# Altium PCB OSV-UserInterface.PcbDoc
Units mm, origin at the board's own origin, x right, y up, seen from the top; angles counter-clockwise.
Board outline 84 x 100 mm, 2 copper layers (Top Layer, Bottom Layer), stack 1.571 mm thick; 37 components, 32 nets, 144 pads, 13 vias.
Unrouted connection lines stored in the file: 12.
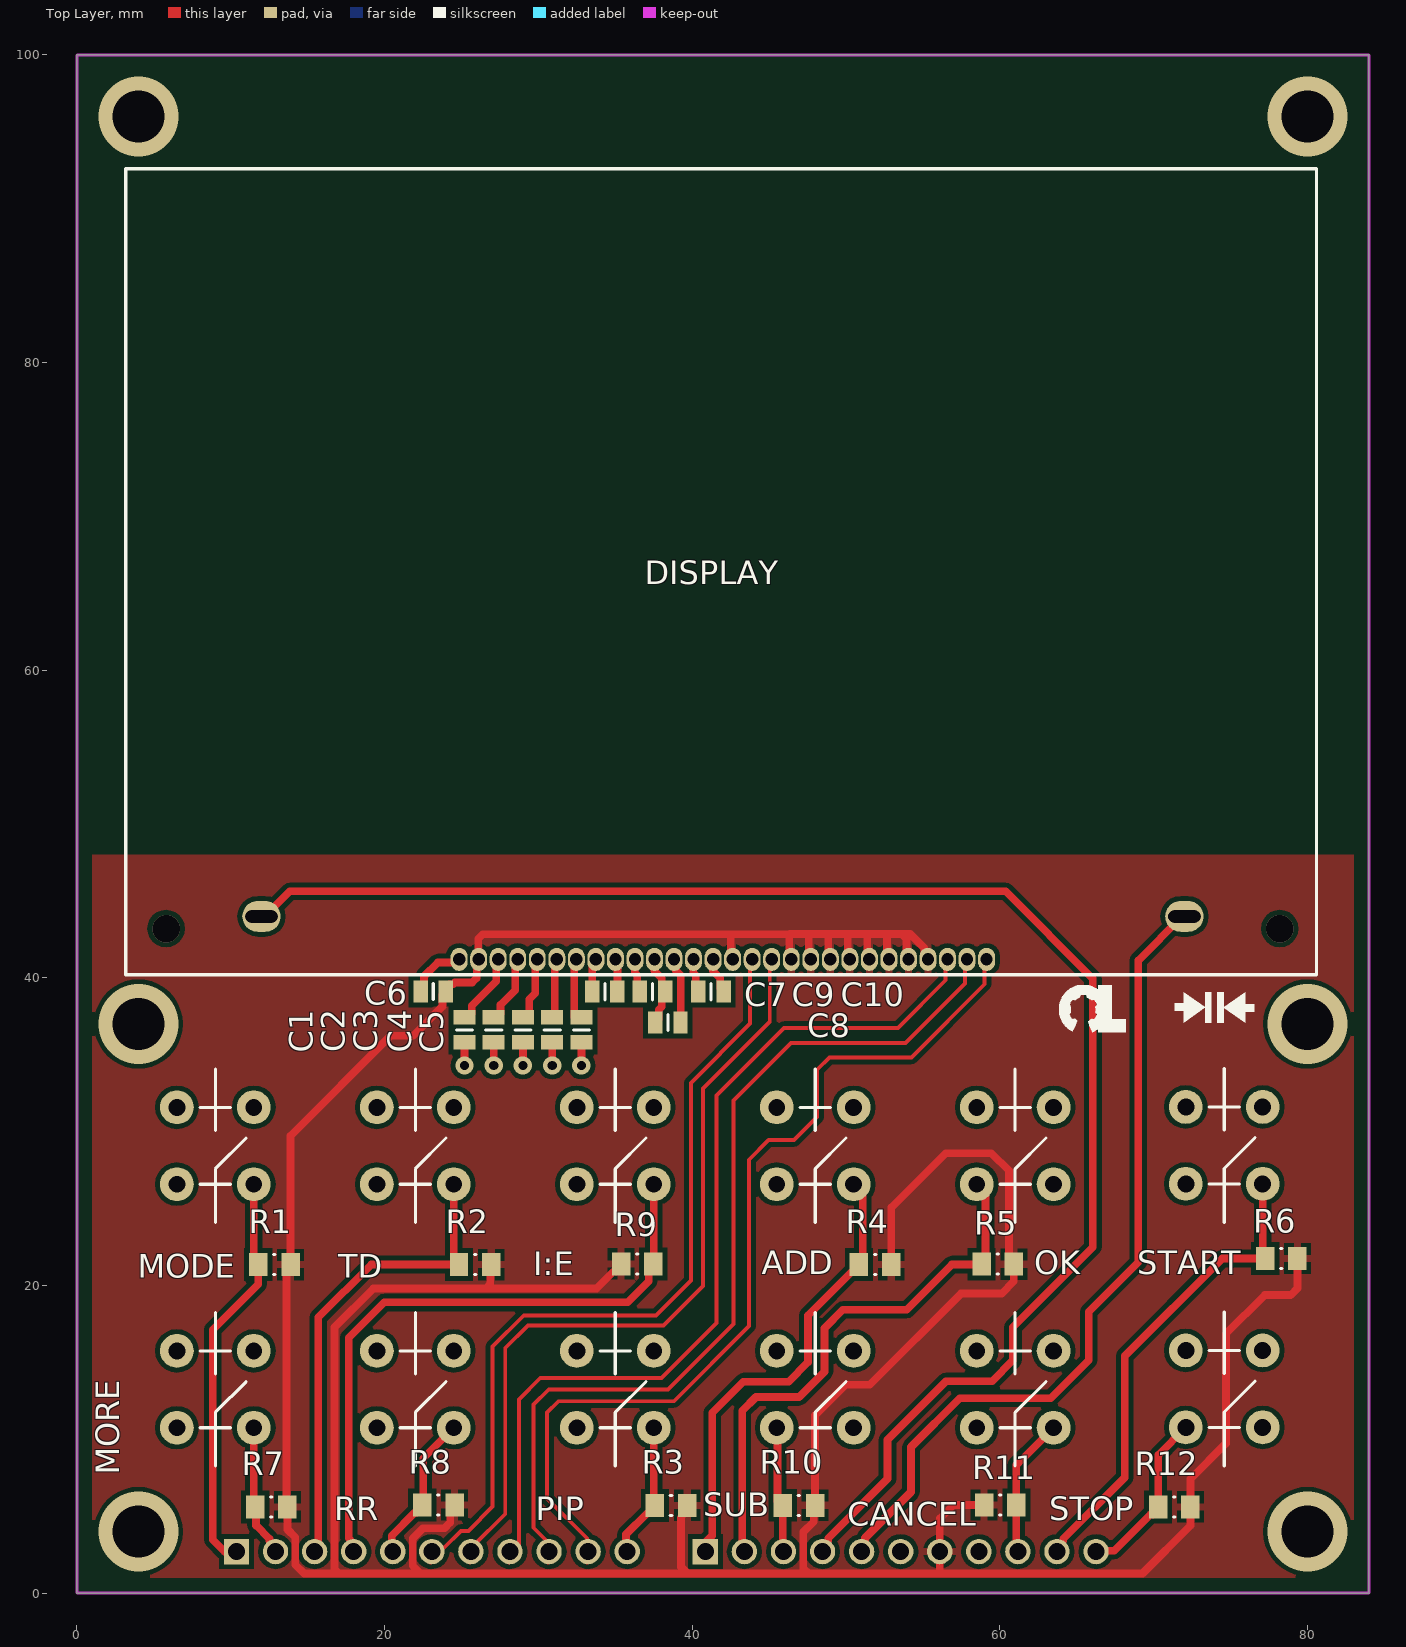
[diagram p0: Top Layer view]
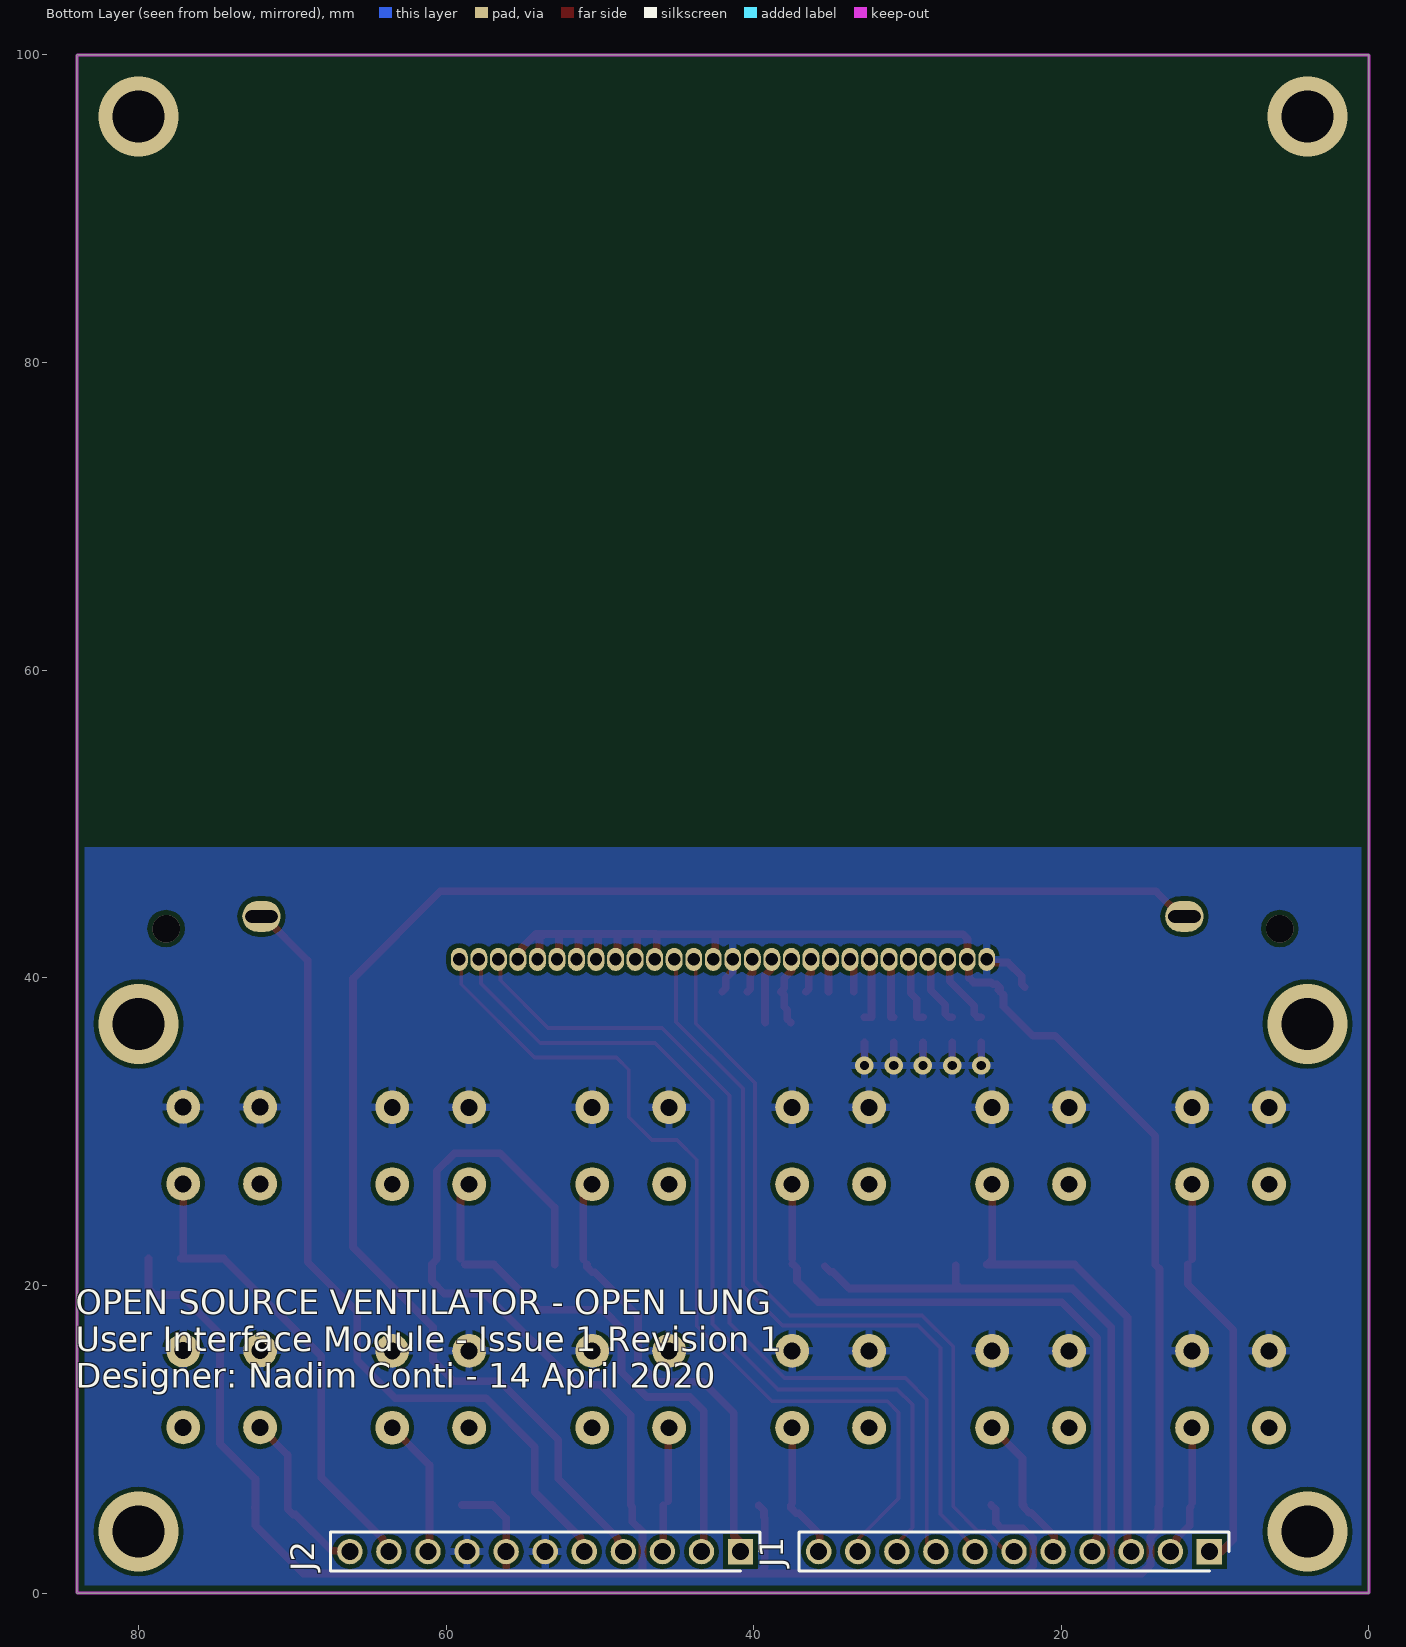
[diagram p1: Bottom Layer view, seen from below]
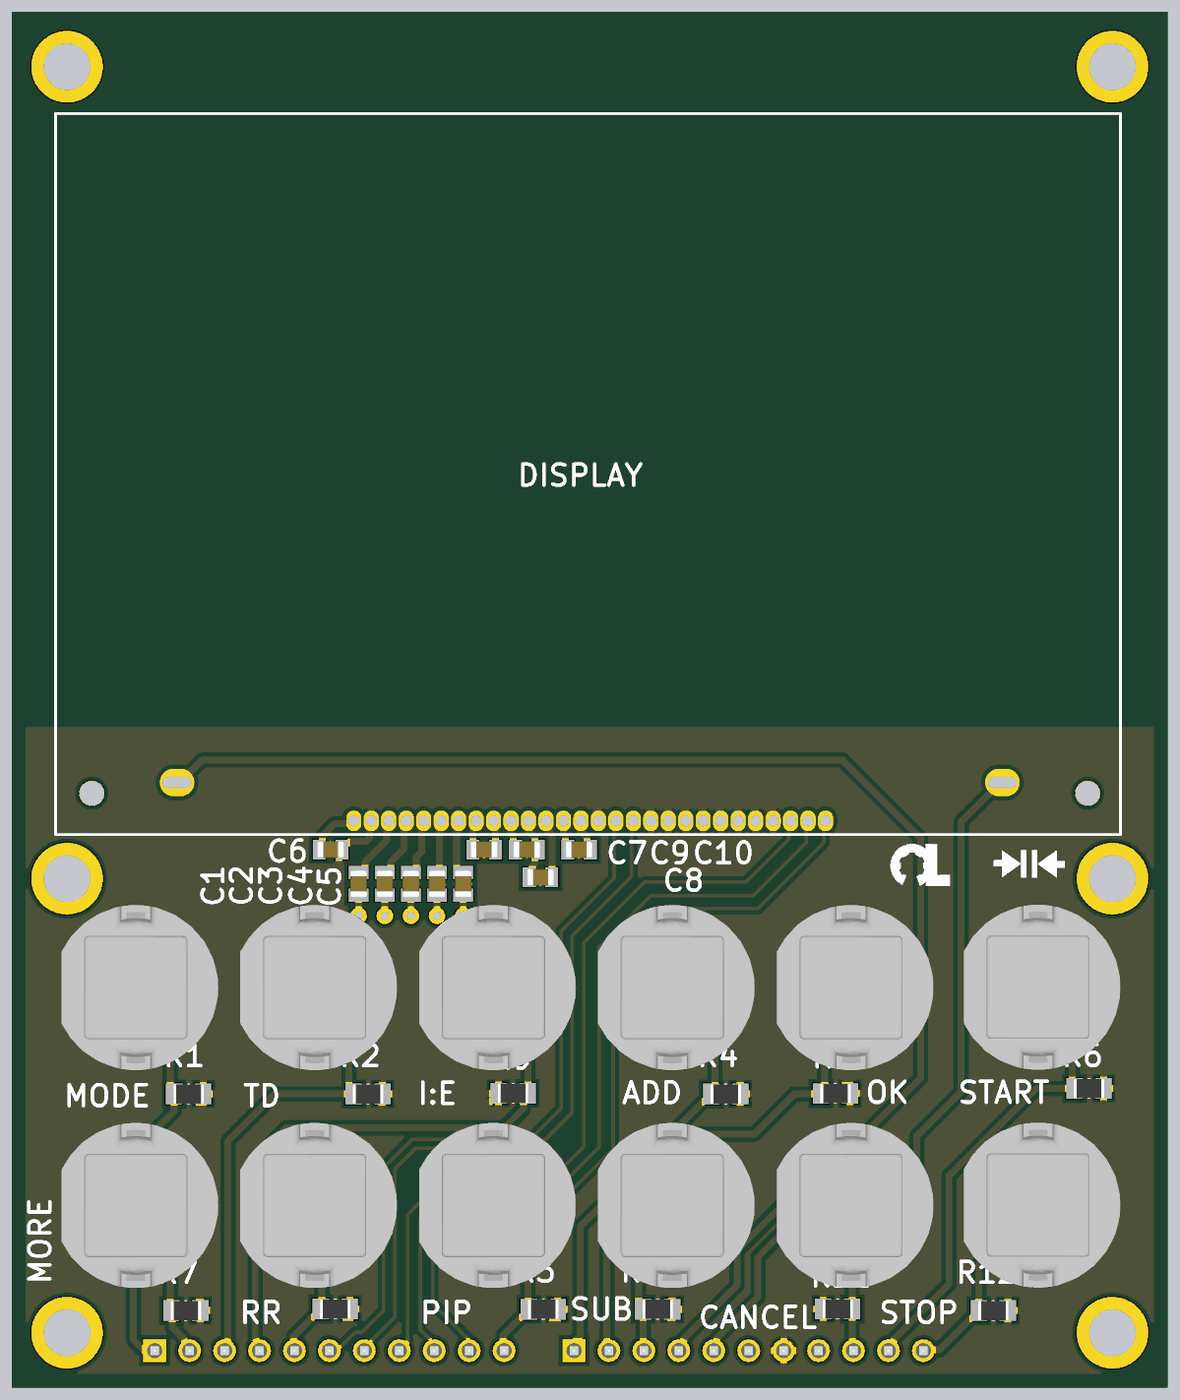
[diagram p2: 3D render of the assembled board from above, using the file's embedded part models]

## Layer stack, top to bottom
Top Solder: solder mask 0.0102, Solder Resist, Dk 3.5
Top Layer: signal copper 0.0356
Dielectric 1: dielectric 1.5, FR-4, Dk 4.8
Bottom Layer: signal copper 0.0356
Bottom Solder: solder mask 0.0102, Solder Resist, Dk 3.5

## Board outline
0,0 0,100 84,100 84,0

## Design rules (kind name [scope] priority, off if disabled: settings)
BoardOutlineClearance [All] p1: gap=0.4 ignorepadtopadclearanceinfootprint=FALSE except(0: Arc-SplitContinuation Track-SplitContinuation SMDPad-SplitContinuation THPad-SplitContinuation Via-SplitContinuation Fill-SplitContinuation Poly-SplitContinuation Region-SplitContinuation Text-SplitContinuation)
Clearance [All] p1: gap=0.15 ignorepadtopadclearanceinfootprint=FALSE except(0.3: Arc-Fill Arc-Poly Arc-Region Track-Fill Track-Poly Track-Region SMDPad-Fill SMDPad-Poly SMDPad-Region THPad-Fill THPad-Poly THPad-Region Via-Fill Via-Poly Via-Region Fill-Fill Fill-Poly Fill-Region Poly-Poly Poly-Region Region-Region)
HoleSize [All] p1: absolutevalues=TRUE maxlimit=5 minlimit=0.025 maxpercent=80.000 minpercent=20.000
MinimumSolderMaskSliver [All] p1: minsoldermaskwidth=0.15
PolygonConnect [All] p1: connectstyle=Relief reliefconductorwidth=0.5 reliefentries=4 polygonreliefangle="90 Angle" airgapwidth=0.254
RoutingVias [All] p1: holewidth=0.6 width=1.2 viastyle="Through Hole" minholewidth=0.6 minwidth=0.8 maxholewidth=0.6 maxwidth=2
SilkToSilkClearance [All] p1: silktosilkclearance=0
SilkToSolderMaskClearance [IsPad] p1: minsilkscreentomaskgap=0.15 clearancetoexposedcopper=TRUE
SolderMaskExpansion [All] p1: expansion=0.102 istentingtop=FALSE
Width [All] p1: maxlimit=3 minlimit=0.254 preferedwidth=0.254 minimp=50.000000 maximp=50.000000 favimp=50.000000
26 further rules are at their usual default settings.

## Components (designator, comment, footprint, x,y, rotation, side; value= is the part's Value field where it differs from the comment)
ADD "D6C-XX-XX_Switch" D6C-60-F1_Blue-Switch 48,29.082 r0 top locked
C1 "GCM21BR71H105KA03K" CAPC2012X140N 25.2,36.62 r90 top
C2 "GCM21BR71H105KA03K" CAPC2012X140N 27.1,36.62 r90 top
C3 "GCM21BR71H105KA03K" CAPC2012X140N 29,36.62 r90 top
C4 "GCM21BR71H105KA03K" CAPC2012X140N 30.9,36.62 r90 top
C5 "GCM21BR71H105KA03K" CAPC2012X140N 32.8,36.62 r90 top
C6 "GCM21BR71H105KA03K" CAPC2012X140N 23.166,39.117 r0 top
C7 "GCM21BR71H105KA03K" CAPC2012X140N 34.32,39.1 r180 top
C8 "GCM21BR71H105KA03K" CAPC2012X140N 38.42,37.1 r180 top
C9 "GCM21BR71H105KA03K" CAPC2012X140N 37.42,39.1 r180 top
C10 "GCM21BR71H105KA03K" CAPC2012X140N 41.22,39.1 r180 top
CANCEL "D6C-XX-XX_Switch" D6C-30-F1_YELLOW-SWITCH 61,13.25 r0 top locked
DISPLAY "64128M_126x64_LCD_MODULE" 64128M_LCD 42,40.2 r0 top
I:E "D6C-XX-XX_Switch" D6C-00-F1_WHITE-SWITCH 35,29.082 r0 top locked
J1 "PRPC011SFAN-RC" HDRV11W64P254_1X11_2794X254X1058P 10.375,2.7 r0 bottom
J2 "PRPC011SFAN-RC" HDRV11W64P254_1X11_2794X254X1058P 40.855,2.7 r0 bottom
MODE "D6C-XX-XX_Switch" D6C-30-F1_YELLOW-SWITCH 9,29.082 r0 top locked
MORE "D6C-XX-XX_Switch" D6C-00-F1_White-Switch 9,13.25 r0 top locked
OK "D6C-XX-XX_Switch" D6C-50-F1_GREEN-Switch 61,29.082 r0 top locked
PIP "D6C-XX-XX_Switch" D6C-00-F1_WHITE-SWITCH 35,13.25 r0 top locked
R1 "Resistor 10k +/-1% 0805 125 mW" RESC2013X50X35ML15T15 12.84,21.358 r0 top value=10k
R2 "Resistor 10k +/-1% 0805 125 mW" RESC2013X50X35ML15T15 25.89,21.358 r0 top value=10k
R3 "Resistor 10k +/-1% 0805 125 mW" RESC2013X50X35ML15T15 38.625,5.7 r0 top value=10k
R4 "Resistor 10k +/-1% 0805 125 mW" RESC2013X50X35ML15T15 51.89,21.358 r0 top value=10k
R5 "Resistor 10k +/-1% 0805 125 mW" RESC2013X50X35ML15T15 59.865,21.383 r0 top value=10k
R6 "Resistor 10k +/-1% 0805 125 mW" RESC2013X50X35ML15T15 78.3,21.75 r0 top value=10k
R7 "Resistor 10k +/-1% 0805 125 mW" RESC2013X50X35ML15T15 12.64,5.608 r0 top value=10k
R8 "Resistor 10k +/-1% 0805 125 mW" RESC2013X50X35ML15T15 23.5,5.725 r0 top value=10k
R9 "Resistor 10k +/-1% 0805 125 mW" RESC2013X50X35ML15T15 36.425,21.4 r180 top value=10k
R10 "Resistor 10k +/-1% 0805 125 mW" RESC2013X50X35ML15T15 46.94,5.708 r0 top value=10k
R11 "Resistor 10k +/-1% 0805 125 mW" RESC2013X50X35ML15T15 60.025,5.725 r180 top value=10k
R12 "Resistor 10k +/-1% 0805 125 mW" RESC2013X50X35ML15T15 71.34,5.608 r0 top value=10k
RR "D6C-XX-XX_Switch" D6C-00-F1_WHITE-SWITCH 22,13.25 r0 top locked
START "D6C-XX-XX_Switch" D6C-50-F1_GREEN-Switch 74.59,29.108 r0 top locked
STOP "D6C-XX-XX_Switch" D6C-40-F1_RED-SWITCH 74.59,13.275 r0 top locked
SUB "D6C-XX-XX_Switch" D6C-60-F1_Blue-Switch 48,13.25 r0 top locked
TD "D6C-XX-XX_Switch" D6C-00-F1_WHITE-SWITCH 22,29.082 r0 top locked

## Footprints (in the part's own frame and the unit in brackets; to place one, negate y for a bottom-side part, rotate by r counter-clockwise, add the part's x,y. Pads: shape width x height; smd on the part's side, far side on the other; paste and mask are expansions set on the pad)
64128M_LCD [mm]
  oval 1.1x1.5 hole 0.8 paste+0 mask+0: 1(17.14,1) 2(15.87,1)
  oval 1.1x1.5 hole 0.8 mask+0: 3(14.6,1) 4(13.33,1) 5(12.06,1) 6(10.79,1) 7(9.52,1) 8(8.25,1) 9(6.98,1) 10(5.71,1) 11(4.44,1) 12(3.17,1) 13(1.9,1) 14(0.63,1) 15(-0.64,1) 16(-1.91,1) 17(-3.18,1) 18(-4.45,1) 19(-5.72,1) 20(-6.99,1) 21(-8.26,1) 22(-9.53,1) 23(-10.8,1) 24(-12.07,1) 25(-13.34,1) 26(-14.61,1) 27(-15.88,1) 28(-17.15,1)
  oval 2.5x2 hole 0.8 slot 2.1 at 0 deg mask+0: 29(-30,3.79) 30(30,3.79)
  body extent -38.7,0 38.7,52.4, height 6.8
CAPC2012X140N [mm]
  rect 0.94x1.43 smd: 1(-0.82,0) 2(0.82,0)
  silkscreen extent 0,-0.53 0,0.53, body extent -1,-0.63 1,0.63, height 1.4
D6C-00-F1_WHITE-SWITCH [mm]
  round 2.2 hole 1.1 mask+0: 1(-2.5,2.5) 1(2.5,2.5) 2(-2.5,-2.5) 2(2.5,-2.5)
  silkscreen extent -1,-5 2,5, body extent -5.4,-6 6,6, height 11.47
D6C-00-F1_White-Switch [mm]
  round 2.2 hole 1.1 mask+0: 1(-2.5,2.5) 1(2.5,2.5) 2(-2.5,-2.5) 2(2.5,-2.5)
  silkscreen extent -1,-5 2,5, body extent -5.4,-6 6,6, height 11.47
D6C-30-F1_YELLOW-SWITCH [mm]
  round 2.2 hole 1.1 mask+0: 1(-2.5,2.5) 1(2.5,2.5) 2(-2.5,-2.5) 2(2.5,-2.5)
  silkscreen extent -1,-5 2,5, body extent -5.4,-6 6,6, height 11.47
D6C-40-F1_RED-SWITCH [mm]
  round 2.2 hole 1.1 mask+0: 1(-2.5,2.5) 1(2.5,2.5) 2(-2.5,-2.5) 2(2.5,-2.5)
  silkscreen extent -1,-5 2,5, body extent -5.4,-6 6,6, height 11.47
D6C-50-F1_GREEN-Switch [mm]
  round 2.2 hole 1.1 mask+0: 1(-2.5,2.5) 1(2.5,2.5) 2(-2.5,-2.5) 2(2.5,-2.5)
  silkscreen extent -1,-5 2,5, body extent -5.4,-6 6,6, height 11.47
D6C-60-F1_Blue-Switch [mm]
  round 2.2 hole 1.1 mask+0: 1(-2.5,2.5) 1(2.5,2.5) 2(-2.5,-2.5) 2(2.5,-2.5)
  silkscreen extent -1,-5 2,5, body extent -5.4,-6 6,6, height 11.47
HDRV11W64P254_1X11_2794X254X1058P [mm]
  rect 1.65x1.65 hole 1.1: 1(0,0)
  round 1.65 hole 1.1: 2(2.54,0) 3(5.08,0) 4(7.62,0) 5(10.16,0) 6(12.7,0) 7(15.24,0) 8(17.78,0) 9(20.32,0) 10(22.86,0) 11(25.4,0)
  silkscreen extent -1.27,-1.27 26.67,1.27, body extent -1.27,-1.27 26.67,1.27, height 10.58
RESC2013X50X35ML15T15 [mm] "Chip Resistor, 2-Leads, Body 2.2x1.4mm, IPC Low Density"
  rect 1.2x1.5 smd: 1(-1.05,0) 2(1.05,0)
  silkscreen extent -0.05,-0.65 0.05,0.65, body extent -1.1,-0.7 1.1,0.7, height 0.5

## Part data
C1 C2 C3 C4 C5 C6 C7 C8 C9 C10: "Capacitor", Capacitance=1u, Manufacturer_Name="Murata Electronics", Mouser Part Number=81-GCM21BR71H105KA3K, Datasheet Link=https://psearch.en.murata.com/capacitor/product/GCM21BR71H105KA03%23.html, Height=1.4mm, Manufacturer_Part_Number=GCM21BR71H105KA03K, Mouser Price/Stock=https://www.mouser.com/Search/Refine.aspx?Keyword=81-GCM21BR71H105KA3K
DISPLAY: "64128M Series LCD Module (128 x 64 DOTS)"
J1 J2: "Connector", Manufacturer_Name=Sullins, Datasheet Link=https://media.digikey.com/PDF/Data%20Sheets/Sullins%20PDFs/xRxCzzzSxxN-RC_ST_11635-B.pdf, Height=10.58mm, Manufacturer_Part_Number=PRPC011SFAN-RC
R1 R2 R3 R4 R5 R6 R7 R8 R9 R10 R11 R12: library part CMP-009-00018-5, "Chip Resistor, 10 KOhm, +/- 1%, 125 mW, -55 to 155 degC, 0805 (2012 Metric)", Case/Package=0805, Max Operating Temperature=155°C, Min Operating Temperature=-55°C, Power=125mW, Tolerance=1%, Voltage Rating=150V, Mounting Technology=SM, Pins=2, RoHS Compliant=True

## Via types
v1: diameter 5.2, hole 3.4, Top Layer to Bottom Layer, 6 vias
v2: diameter 1.2, hole 0.6, Top Layer to Bottom Layer, 5 vias
v3: diameter 1.8, hole 1.8, Top Layer to Bottom Layer, 2 vias

## Nets (pads, with @x,y where several pads share a name; then routed paths per layer and width w, separated by ;. In a path a pad name is that pad's centre, name@x,y a point inside that pad or via, vN(x,y) a via of type N, cw(c..) or ccw(c..) an arc to the next point about the centre after c; other vN are vias at no path point)
+3V: C6.2 DISPLAY.4 DISPLAY.5 DISPLAY.6 DISPLAY.7 DISPLAY.8 DISPLAY.9 DISPLAY.10 DISPLAY.11 DISPLAY.14 DISPLAY.27 J2.7 R1.2 R2.2 R3.2 R4.2 R5.2 R6.2 R7.2 R8.2 R9.2 R10.2 R11.2 R12.2 | length 276.6
  Top Layer w0.5: C6.2 23.986,39.362 24.206,39.582 24.451,39.582 24.569,39.7 25.707,39.7 26,39.993 26,41.19 25.99,41.2 26.1,41.31 26.1,42.532 26.393,42.825 42.5,42.825 ; C6.2@24.094,39.225 23.766,38.897 23.766,38.141 21.862,36.237 20.388,36.237 13.89,29.74 R1.2 13.625,21.093 13.625,5.673 R7.2 13.69,4.135 14.2,3.625 14.2,1.85 14.775,1.275 17.025,1.275 ; R8.2 24.27,5.445 24.27,4.595 23.9,4.225 22.5,4.225 21.825,3.55 21.825,1.775 22.325,1.275 ; R2.2@26.875,21.293 26.875,20.093 26.582,19.8 ; R9.2@35.375,21.25 35.025,20.9 34.875,20.9 33.775,19.8 26.582,19.8 ; R3.2 39.325,5.35 39.325,4.957 39.275,4.907 39.275,1.7 39.7,1.275 ; DISPLAY.14@42.5,41.2 42.5,42.825 ; DISPLAY.11@46.31,41.2 46.31,42.81 46.35,42.85 47.5,42.85 ; 46.325,42.825 42.5,42.825 ; DISPLAY.10@47.58,41.2 47.58,42.77 47.5,42.85 ; DISPLAY.9@48.85,41.2 48.85,42.825 48.875,42.85 ; DISPLAY.8@50.12,41.2 50.12,42.805 50.075,42.85 ; DISPLAY.7@51.39,41.2 51.39,42.84 51.4,42.85 ; DISPLAY.6@52.66,41.2 52.66,42.84 52.65,42.85 ; R4.2 52.94,25.065 56.475,28.6 59.45,28.6 60.6,27.45 60.6,21.698 R5.2 60.915,20.265 60.125,19.475 57.475,19.475 51.55,13.55 49.975,13.55 47.99,11.565 R10.2 47.9,5.618 47.9,4.65 47.225,3.975 47.225,1.625 47.575,1.275 ; DISPLAY.5@53.93,41.2 53.93,42.545 53.625,42.85 ; DISPLAY.4@55.2,41.2 55.085,41.315 55.085,41.94 54.175,42.85 53.625,42.85 ; R11.2@58.965,5.725 56.975,5.725 56.095,4.845 J2.7 56.095,1.275 ; R12.2@72.438,5.56 R12.2 ; R6.2 79.35,19.825 78.9,19.375 77.225,19.375 74.7,16.85 74.7,9.725 72.39,7.415 R12.2 ; 17.025,1.275 22.325,1.275 ; 17.025,1.275 16.75,1.55 16.75,17.275 19.275,19.8 26.582,19.8 ; 22.325,1.275 39.7,1.275 ; 39.7,1.275 47.575,1.275 ; 47.5,42.85 48.875,42.85 ; 47.575,1.275 56.095,1.275 ; 48.875,42.85 50.075,42.85 ; 50.075,42.85 51.4,42.85 ; 51.4,42.85 52.65,42.85 ; 52.65,42.85 53.625,42.85 ; 56.095,1.275 69.275,1.275 72.39,4.39 R12.2
A0_LCD: DISPLAY.3 J1.8 | length 59.9
  Top Layer w0.254: J1.8@28.08,2 28.08,2.155 28.75,2.825 28.75,12.6 30.125,13.975 37.999,13.975 41.575,17.551 41.575,32.35 45.975,36.75 53.375,36.75 56.47,39.845 DISPLAY.3@56.47,41.2
A_LCD: DISPLAY.29 J2.4 | length 103.5
  Top Layer w0.5: DISPLAY.29@11.87,43.99 12.215,43.99 13.85,45.625 60.375,45.625 66.05,39.95 66.05,22.475 60.85,17.275 60.85,15.125 59.5,13.775 56.5,13.775 52.7,9.975 52.7,7.425 48.839,3.564 48.839,3.375 48.475,3.011 J2.4
ADD: ADD.2 J2.1 R4.1 | length 29.3
  Top Layer w0.5: J2.1@40.78,2.9 40.78,3.23 41.3,3.75 41.3,11.725 43.325,13.75 46.275,13.75 47.525,15 47.525,18.043 50.34,20.858 50.49,20.858 50.84,21.208 R4.1 ; R4.1@51.09,21.723 ADD.2@51.09,26.608
CANCEL: CANCEL.2 J2.9 R11.1 | length 9.1
  Top Layer w0.5: J2.9 61.075,2.8 R11.1 61.075,8.325 CANCEL.2@63.5,10.75
CAP1N: C8.2 C9.1 DISPLAY.18 | length 4.7
  Top Layer w0.5: DISPLAY.18@37.42,41.2 37.535,41.085 37.535,40.465 38.02,39.98 38.02,39.32 C9.1 38.02,38.88 38.02,38.12 37.82,37.92 37.82,37.32 C8.2
CAP1P: C9.2 DISPLAY.19 | length 2.3
  Top Layer w0.5: DISPLAY.19@36.15,41.2 36.265,41.085 36.265,40.335 36.427,40.173 36.427,39.273 C9.2
CAP2N: C7.2 DISPLAY.21 | length 2.1
  Top Layer w0.5: C7.2 33.5,41.09 DISPLAY.21@33.61,41.2
CAP2P: C7.1 DISPLAY.20 | length 2.2
  Top Layer w0.5: DISPLAY.20@34.88,41.2 34.88,40.838 35.14,40.578 C7.1
CAP3P: C8.1 DISPLAY.17 | length 4.3
  Top Layer w0.5: DISPLAY.17@38.69,41.2 38.935,40.955 38.935,40.482 39.26,40.156 39.26,37.12 C8.1
CS_LCD: DISPLAY.1 J1.10 | length 60.5
  Top Layer w0.254: J1.10@33.16,2 33.16,3.565 30.575,6.15 30.575,11.75 31.3,12.475 38.811,12.475 43.7,17.364 43.7,28.175 44.975,29.45 46.625,29.45 48.125,30.95 48.125,34.025 48.925,34.825 54.25,34.825 59.01,39.585 DISPLAY.1@59.01,41.2
GND: ADD.1 C1.1 C2.1 C3.1 C4.1 C5.1 C6.1 C10.1 CANCEL.1 DISPLAY.15 DISPLAY.28 I:E.1 J2.6 J2.8 MODE.1 MORE.1 OK.1 PIP.1 RR.1 START.1 STOP.1 SUB.1 TD.1 | length 13.3
  Top Layer w0.5: C6.1@22.371,39.387 22.566,39.582 22.566,40.091 23.466,40.991 24.511,40.991 DISPLAY.28@24.72,41.2 ; v2(25.2,34.3) C1.1 ; v2(27.1,34.3) C2.1 ; v2(29,34.3) C3.1 ; v2(30.9,34.3) C4.1 ; v2(32.8,34.3) C5.1 ; DISPLAY.15@41.23,41.2 41.345,41.085 41.345,40.455 41.82,39.98 41.82,39.32 C10.1
I:E: I:E.2 J1.4 R9.1 | length 41.2
  Top Layer w0.5: J1.4@17.92,2.7 17.775,2.845 17.775,3.475 17.675,3.575 17.675,16.6 19.975,18.9 35.8,18.9 37.182,20.282 37.182,21.107 R9.1 ; R9.1@37.5,21.698 I:E.2@37.5,26.582
K_LCD: DISPLAY.30 J2.5 | length 53.4
  Top Layer w0.5: J2.5 51.235,2.92 51.235,3.585 54.225,6.575 54.225,9.5 57.4,12.675 63.3,12.675 65.775,15.15 65.775,18.288 69,21.513 69,41.12 DISPLAY.30@71.87,43.99
MODE: J1.1 MODE.2 R1.1 | length 25.9
  Top Layer w0.5: J1.1 9.6,2.7 8.825,3.475 8.825,17.125 11.79,20.09 R1.1 ; R1.1@11.5,21.698 MODE.2@11.5,26.582
MORE: J1.2 MORE.2 R7.1 | length 8.3
  Top Layer w0.5: R7.1@11.5,5.865 MORE.2@11.5,10.75 ; R7.1 11.65,5.548 11.65,4.401 12.519,3.531 12.519,3.407 12.915,3.011 J1.2
OK: J2.2 OK.2 R5.1 | length 35.7
  Top Layer w0.5: J2.2@43.32,3 43.32,2.605 43.25,2.675 43.25,11.85 44.15,12.75 46.95,12.75 48.6,14.4 48.6,17.225 49.8,18.425 53.95,18.425 56.883,21.358 R5.1@58.775,21.358 ; R5.1@59.065,21.748 OK.2@59.065,26.633
PIP: J1.11 PIP.2 R3.1 | length 8.8
  Top Layer w0.5: J1.11 35.7,2.775 35.7,3.825 37.075,5.2 37.225,5.2 37.575,5.55 R3.1 ; R3.1@37.5,5.865 PIP.2@37.5,10.75
RR: J1.5 R8.1 RR.2 | length 9.8
  Top Layer w0.5: J1.5@20.46,2.7 20.46,3.735 21.95,5.225 22.1,5.225 22.45,5.575 R8.1 ; R8.1@22.525,5.725 22.525,8.775 RR.2@24.5,10.75
RST_LCD: DISPLAY.2 J1.9 | length 60.1
  Top Layer w0.254: J1.9@30.62,2 30.62,3.305 29.675,4.25 29.675,12.25 30.675,13.25 38.43,13.25 42.675,17.495 42.675,32.025 46.425,35.775 53.875,35.775 57.74,39.64 DISPLAY.2@57.74,41.2
SPI-CLK_LCD: DISPLAY.12 J1.7 | length 52.4
  Top Layer w0.254: J1.7@25.54,2 25.719,2.179 25.719,3.019 27.85,5.15 27.85,15.925 29.325,17.4 38.125,17.4 40.7,19.975 40.7,32.8 45.04,37.14 DISPLAY.12@45.04,41.2
SPI-MOSI_LCD: DISPLAY.13 J1.6 | length 53.2
  Top Layer w0.254: J1.6@23,2 23,2.247 23.72,2.967 23.88,2.967 24.963,4.05 25.45,4.05 27.025,5.625 27.025,16.025 29.05,18.05 37.65,18.05 39.925,20.325 39.925,33.175 43.77,37.02 DISPLAY.13@43.77,41.2
START: J2.10 R6.1 START.2 | length 31.2
  Top Layer w0.5: J2.10 63.715,3.011 64.121,3.417 64.121,3.521 68.114,7.514 68.114,15.414 74.45,21.75 R6.1@77.09,21.75 ; START.2@77.09,26.608 R6.1@77.09,21.75 ; R6.1 R6.1@77.09,21.75
STOP: J2.11 R12.1 STOP.2 | length 11.2
  Top Layer w0.5: J2.11 66.305,2.75 67.432,2.75 69.79,5.108 69.94,5.108 70.29,5.458 R12.1 70.29,8.975 STOP.2@72.09,10.775
SUB: J2.3 R10.1 SUB.2 | length 7.9
  Top Layer w0.5: R10.1@45.55,5.965 SUB.2@45.55,10.85 ; J2.3@45.86,2.7 45.86,2.9 45.89,2.93 R10.1
TD: J1.3 R2.1 TD.2 | length 31.1
  Top Layer w0.5: J1.3@15.6,2.771 15.697,2.868 15.697,17.922 19.133,21.358 R2.1 24.5,21.698 TD.2@24.5,26.582
V0: C1.2 DISPLAY.26 | length 4.8
  Top Layer w0.5: C1.2 25.445,37.44 25.665,37.66 25.665,38.19 27.26,39.785 DISPLAY.26@27.26,41.2
V1: C2.2 DISPLAY.25 | length 4.5
  Top Layer w0.5: C2.2 27.323,37.44 27.543,37.66 27.543,38.243 28.5,39.2 28.5,41.17 DISPLAY.25@28.53,41.2
V2: C3.2 DISPLAY.24 | length 4.3
  Top Layer w0.5: C3.2 29.4,37.44 29.4,38.6 29.8,39 DISPLAY.24@29.8,41.2
V3: C4.2 DISPLAY.23 | length 3.9
  Top Layer w0.5: C4.2 31.07,37.44 DISPLAY.23@31.07,41.2
V4: C5.2 DISPLAY.22 | length 4.2
  Top Layer w0.5: DISPLAY.22@32.34,41.2 32.34,37.44 C5.2
VOUT_LCD: C10.2 DISPLAY.16 | length 2.3
  Top Layer w0.5: DISPLAY.16@39.96,41.2 40.075,41.085 40.075,40.325 40.227,40.173 40.227,39.273 C10.2
copper on no net:
  other v1: 4,4 80,4 4,37 80,37 4,96 80,96
  other v3: 5.8,43.2 78.2,43.2

## Polygon pours and split planes (outlines as drawn)
GND on Bottom Layer "GND_L02_P000" (solid, pour order 0): 0.5,48.5 83.5,48.5 83.5,0.5 0.5,0.5
+3V on Top Layer "+3V_L01_P001" (solid, remove dead copper, pour order 1): 1,48 1,1 83,1 83,48

## Keep-outs
Keep-Out Layer:
  the board outline again, w0.2

## Silkscreen, mask and mechanical layers (free items; w line width, h text height)
Top Overlay:
  drawing of 7 lines, arcs and shapes, not listed
Bottom Overlay:
  text "OPEN SOURCE VENTILATOR - OPEN LUNG / User Interface Module - Issue 1 Revision 1 / Designer: Nadim Conti - 14 April 2020" at 84.083,13.339 h1.6
DIMENSIONS:
  lines w0.2: 6.41,16.142 6.41,21.142 ; 6.5,10.75 11.5,10.75 11.5,15.75 ; 6.5,26.582 11.5,26.582 11.5,31.582 6.5,31.582 ; 19.5,15.75 19.5,10.75 24.5,10.75 24.5,15.75 ; 19.5,26.582 19.5,31.582 ; 32.5,15.75 32.5,10.75 37.5,10.75 37.5,15.75 ; 45.5,15.75 45.5,10.75 50.5,10.75 50.5,15.75 ; 45.5,26.582 45.5,31.582 ; 58.5,15.75 58.5,10.75 63.5,10.75 63.5,15.75 ; 32.5,26.582 37.5,26.582 37.5,31.582 32.5,31.582 32.5,26.582 ; 58.5,26.582 63.5,26.582 63.5,31.582 58.5,31.582 58.5,26.582

## Dimensions
77.09,5.775 to 84,-5 on DIMENSIONS
80,96 to 59.14,41.2 on DIMENSIONS
26.12,41.2 to 24.85,41.2 on DIMENSIONS
37.5,31.582 to 32.5,31.582 on DIMENSIONS
58.5,31.582 to 50.5,31.582 on DIMENSIONS
63.5,31.582 to 72.09,31.608 on DIMENSIONS
58.5,5.75 to 63.5,5.75 on DIMENSIONS
84,100 to 106,0 on DIMENSIONS
80,96 to 84,0 on DIMENSIONS
80,37 to 80,96 on DIMENSIONS
77.09,31.608 to 80,37 on DIMENSIONS
77.09,15.775 to 77.09,26.608 on DIMENSIONS
77.09,10.775 to 77.09,15.775 on DIMENSIONS
80,4 to 84,0 on DIMENSIONS
77.09,10.775 to 80,4 on DIMENSIONS
20.46,0 to 23,0 on DIMENSIONS
35.92,0 to 41,0 on DIMENSIONS
10.497,0 to 4.122,1.3 on DIMENSIONS
4,96 to 42,93 on DIMENSIONS
4,96 to 80,96 on DIMENSIONS
0,0 to 84,0 on DIMENSIONS

## Text inside footprints (layer, text, board x,y; h text height)
DISPLAY: DIMENSIONS "OUTLINE" at 7.08,92.743 h1.2; DIMENSIONS "FRAME BORDER" at 6.359,91.106 h1.2; DIMENSIONS "DISPLAY AREA" at 5.931,89.769 h1.2; DIMENSIONS "SILICONE" at 4.398,48.31 h1.2